# Altium PCB BauhallenUhr_Variante_1.PcbDoc (part 2 of 2)
Units mm, origin at the board's own origin, x right, y up, seen from the top; angles counter-clockwise.
Board outline 100.2 x 100.2 mm, 4 copper layers (Top Layer, Signal Layer 2, GND Layer 3, Bottom Layer), stack 1.54 mm thick; 119 components, 80 nets, 566 pads, 118 vias.
Unrouted connection lines stored in the file: 84.
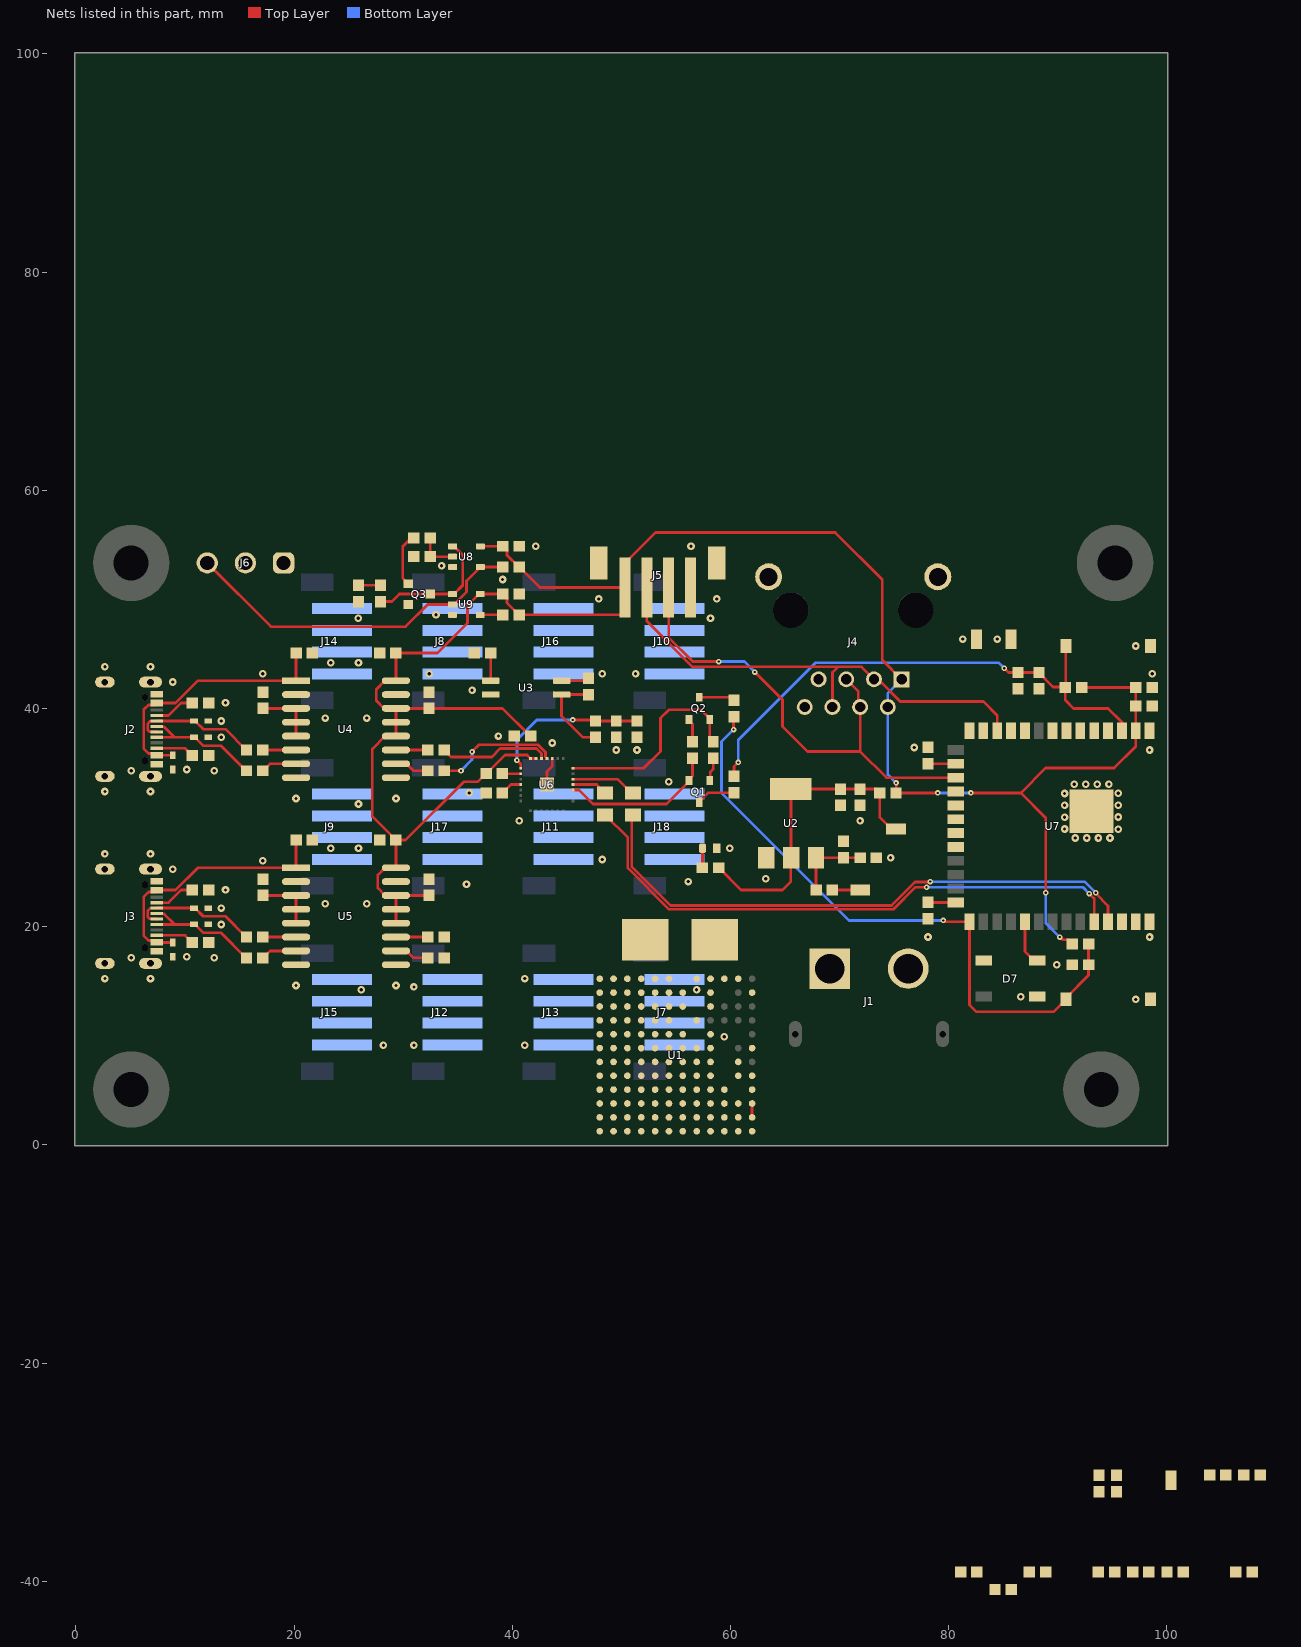
[diagram p2: the nets of this part, all layers, seen from the top]

## Part data
C1 C2 C3 C4 C5 C6 C7 C8 C9 C10 C11 C12 C13 C14 C15 C16 C17 C18 C19 C20 C21 C22 C23 C24 C25 C26 C27 C28 C29: library part Capacitor, "0603"
D1 D2 D3 D4 D5 D6: library part ESD_Protection_Diode, ComponentLink1Description=Supplier, ComponentLink1URL=https://www.digikey.com/en/products/detail/onsemi/ESD5B5-0ST1G/1792206
F1: library part Fuse, "FUSE BRD MNT 10A 125VAC/VDC SMD"
J1: library part PCB_Connector, "Socket, DC supply, male, PIN: 2.", Package=Package, Check_prices=https://www.snapeda.com/parts/XT60PW-M/AMASS/view-part/?ref=eda, MF=AMASS, MP=XT60PW-M, SnapEDA_Link=https://www.snapeda.com/parts/XT60PW-M/AMASS/view-part/?ref=snap
J2 J3: "USB - C - Port"
J4: library part RJ45, "Jack Modular Connector 8p8c (RJ45, Ethernet) 90Â° Angle (Right) Shielded Cat3.", Package=None, Check_prices=https://www.snapeda.com/parts/RJE091884511C/Amphenol/view-part/?ref=eda, MF="Amphenol ICC (Commercial Products)", MP=RJE091884511C, SnapEDA_Link=https://www.snapeda.com/parts/RJE091884511C/Amphenol/view-part/?ref=snap, System=Connector
J5: library part Connector_SMD_Small_Symbol, "CONN HEADER SMD 4POS 2MM.", ComponentLink1Description=Supplier, ComponentLink1URL=https://www.digikey.ch/en/products/detail/jst-sales-america-inc/B4B-PH-SM4-TB/926643
J6: library part Screw_Connector, "691214110003 Wurth Elektronik"
J7 J8 J9 J10 J11 J12 J13 J14 J15 J16 J17 J18: library part Connector_SMD, "CONN HEADER SMD 4POS 2MM.", ComponentLink1Description=Supplier, ComponentLink1URL=https://www.digikey.ch/en/products/detail/jst-sales-america-inc/B4B-PH-SM4-TB/926643
LED1: library part "LED_0603, GREEN", "LED 0603, Green, 3.2 V, 20 mA, 430 mcd"
MEC1 MEC2 MEC3 MEC4: "Mounting Hole for M3 Screw, plated to connect signal"
Q1 Q2: library part NPN_Bipolar_Transistor, "SS8050 SOT - 23.", ComponentLink1Description=Supplier, ComponentLink1URL=https://www.digikey.com/en/products/detail/guangdong-inmark-electronics-co-ltd/SS8050/28539054
Q3: library part PNP_Bipolar_Transistor, "Bipolar (BJT) Transistor PNP 25 V 500 mA 150MHz 300 mW Surface Mount SOT-23."
R1 R2 R3 R4 R5 R6 R7 R8 R9 R10 R11 R12 R13 R14 R15 R16 R17 R18 R20 R22 R23 R24 R25 R26 R27 R28 R29 R30 R31 R32 R33 R34 R35 R36 R37 R38 R39 R40: library part Resistor, "0603"
R19 R21: library part 0805_Resistor, "0805"
S1 S2: library part Button
TP1 TP2 TP3 TP4 TP5: "Prüfstecker und Messbuchsen EZ BoardWare S27 SMT Mini Test Terminal, Reel"
U1: library part DCDC_Converter, "Module DC-DC 1-OUT 0.6V to 5V 15A Automotive 133-Pin BGA Tray.", Package="BGA -133 Analog Devices", Availability="In Stock", Check_prices=https://www.snapeda.com/parts/LTM4627EY%23PBF/Analog+Devices/view-part/?ref=eda, MF="Analog Devices", MP=LTM4627EY#PBF, Price=None, Purchase-URL=https://pricing.snapeda.com/search/part/LTM4627EY#PBF/?ref=eda, SnapEDA_Link=https://www.snapeda.com/parts/LTM4627EY%23PBF/Analog+Devices/view-part/?ref=snap
U2: "LDO, 3.3V and 800mA.", ComponentLink1Description=Datasheet, ComponentLink1URL=chrome-extension://efaidnbmnnnibpcajpcglclefindmkaj/https://www.st.com/content/ccc/resource/technical/document/datasheet/99/3b/7d/91/91/51/4b/be/CD00000544.pdf/files/CD00000544.pdf/jcr:content/translations/en.CD00000544.pdf, ComponentLink2Description=Supplier, ComponentLink2URL=https://www.digikey.ch/en/products/detail/stmicroelectronics/LD1117S33CTR/585765
U3: library part Optocoupler, "Optoisolator Transistor Output 3750Vrms 1 Channel 4-SO."
U4 U5: library part USB_Digital_Isolator, "DGT ISOL 2500VRMS 2CH USB 16SOIC."
U6: "USB to UART bridge.", ComponentLink1Description=Datasheet, ComponentLink1URL=chrome-extension://efaidnbmnnnibpcajpcglclefindmkaj/https://www.silabs.com/documents/public/data-sheets/cp2102n-datasheet.pdf, ComponentLink2Description=Supplierlink, ComponentLink2URL=https://www.digikey.ch/en/products/detail/silicon-laboratories-inc/CP2102N-A02-GQFN28R/9863486?utm_source=findchips&utm_medium=aggregator&utm_campaign=buynow
U7: library part ESP32-S3-WROOM-2-N32R16V, "Bluetooth, WiFi 802.11b/g/n, Bluetooth v5.0 Transceiver Module 2.4GHz PCB Trace Surface Mount", Manufacturer="Espressif Systems", Supplier 1 Part Number=1965-ESP32-S3-WROOM-2-N32R16VCT-ND, Supplier 2 Part Number=356-SP32S3WM2N32R16V, Assembly Technology=SMD, ComponentLink1Description="Show Datasheet on SMS Drive", ComponentLink1URL="P:\Electronic Workshop\Datasheets (Refered in Libraries - Don't Change!)\ESP32-S3-WROOM-2-N32R16V_Digikey_1965-ESP32-S3-WROOM-2-N32R16VCT-ND.pdf", Latest Revision Date=17.10.2025, Latest Revision Made By="Simon Gimple", Latest Revision Note="New Part", Manufacturer Part Number=ESP32-S3-WROOM-2-N32R16V, Supplier 1=DigiKey, Supplier 2=Mouser
U8: library part Single_Bus_Buffer_Gate, "Single Bus Buffer Gate With 3-State Outputs, DBV0005A, LARGE T&R.", ComponentLink1Description=Supplier, ComponentLink1URL=https://www.digikey.com/en/products/detail/texas-instruments/SN74LVC1G126DBVR/385722
U9: library part Single_Bus_Buffer_Gate_Inverted, "Single Bus Buffer Gate With 3-State Outputs, DBV0005A, LARGE T&R.", ComponentLink1Description=Supplier

## Via types
v1: diameter 0.7, hole 0.3, Top Layer to Bottom Layer, 83 vias
v2: diameter 0.508, hole 0.203, Top Layer to Bottom Layer, 19 vias
v3: diameter 0.7, hole 0.3, Top Layer to Bottom Layer, tented top, 16 vias

## Nets (pads, with @x,y where several pads share a name; then routed paths per layer and width w, separated by ;. In a path a pad name is that pad's centre, name@x,y a point inside that pad or via, vN(x,y) a via of type N, cw(c..) or ccw(c..) an arc to the next point about the centre after c; other vN are vias at no path point)
+3.3V: C18.1 C19.1 C20.2 C21.2 C22.2 C23.2 C24.2 C28.2 C29.2 J4.1 J4.2 J5.1 Q3.2 R6.2 R20.2 R27.2 R32.2 R38.2 R39.2 R40.2 U4.12 U4.13 U4.14 U4.16 U5.12 U5.13 U5.14 U5.16 U6.6 U6.7 U7.2 U8.5 U9.5 | length 207.7
  Top Layer w0.25: U5.12@29.343,20.32 U5.13@29.343,21.59 U5.14@29.343,22.86 ; C19.1@32.385,22.86 U5.14@29.343,22.86 ; U8.5@37.082,54.864 C28.2@39.128,54.864 39.153,54.864 39.528,54.489 39.528,54.039 40.603,52.964 R39.2@40.628,52.964 ; R39.2@40.653,52.964 42.527,51.09 J5.1@50.34,51.09 ; C22.2@41.68,37.465 41.655,37.465 39.115,40.005 C18.1@32.385,40.005 U4.14@29.343,40.005 ; U6.6@42.18,35.42 U6.7@41.68,35.42 41.368,35.732 39.341,35.732 37.629,34.02 R20.2@37.604,34.02 37.579,34.02 36.833,33.274 35.56,33.274 30.226,27.94 C21.2@29.343,27.94 ; v2(75.184,33.176) 75.184,32.27 R6.2@75.172,32.258 v2(78.994,32.258) ; J4.1@75.695,42.67 73.914,44.451 73.914,51.816 69.596,56.134 53.134,56.134 50.34,53.34 J5.1@50.34,51.09 ; v2(82.042,32.258) 86.614,32.258 ; v2(88.9,23.114) 88.9,29.972 86.614,32.258 ; v2(90.17,19.05) 90.24,19.05 90.5,18.79 90.95,18.79 R32.2@91.325,18.415 ; R27.2@92.19,41.91 C23.2@97.145,41.91 C24.2@97.145,40.234 U7.2@97.145,37.96 97.145,36.509 95.171,34.535 88.891,34.535 86.614,32.258 ; U5.14@29.343,22.86 28.355,22.86 27.686,23.529 27.686,24.731 28.355,25.4 U5.16@29.343,25.4 C21.2@29.343,27.94 ; C21.2@29.343,27.94 29.318,27.94 28.943,28.315 28.943,28.34 27.178,30.105 27.178,36.288 28.355,37.465 U4.12@29.343,37.465 U4.13@29.343,38.735 U4.14@29.343,40.005 ; U4.14@29.343,40.005 28.254,40.005 27.536,40.724 27.536,41.725 28.355,42.545 U4.16@29.343,42.545 C20.2@29.343,45.085 33.147,45.085 35.897,47.835 35.897,49.425 36.952,50.48 U9.5@37.077,50.48 C29.2@39.128,50.48 39.153,50.48 39.528,50.105 39.528,49.655 40.603,48.58 R40.2@40.628,48.58 49.965,48.58 50.34,48.955 J5.1@50.34,51.09
  Bottom Layer w0.25: v2(75.184,33.176) 74.425,33.935 J4.2@74.425,40.13 74.425,41.4 J4.1@75.695,42.67 ; v2(78.994,32.258) v2(82.042,32.258) ; v2(88.9,23.114) 88.9,20.32 v2(90.17,19.05)
+5V: C1.2 C8.2 C10.2 D7.1 J7.2 J8.2 J9.2 J10.2 J11.2 J12.2 J13.2 J14.2 J15.2 J16.2 J17.2 J18.2 R18.2 TP3.1 U1.J1 U1.J2 U1.J3 U1.J4 U1.J5 U1.J6 U1.J7 U1.J8 U1.J9 U1.J10 U1.J12 U1.K1 U1.K2 U1.K3 U1.K4 U1.K5 U1.K6 U1.K7 U1.K8 U1.K9 U1.K10 U1.K11 U1.L1 U1.L2 U1.L3 U1.L4 U1.L5 U1.L6 U1.L7 U1.L8 U1.L9 U1.L10 U1.L11 U1.M1 U1.M2 U1.M3 U1.M4 U1.M5 U1.M6 U1.M7 U1.M8 U1.M9 U1.M10 U1.M11 U3.4 | length 2.6
  Top Layer w0.25: U3.4@44.525,42.545 46.76,42.545 R18.2@46.99,42.775
+12V: C9.2 C11.2 C12.2 F1.2 J6.2 R2.1 R3.2 TP1.1 U1.A1 U1.A2 U1.A3 U1.A4 U1.A5 U1.A6 U1.B1 U1.B2 U1.B3 U1.B4 U1.B5 U1.B6 U1.C1 U1.C2 U1.C3 U1.C4 U1.C5 U1.C6 | length 2.5
  Top Layer w0.25: R2.1@69.343,23.368 TP1.1@71.882,23.368
D1: J7.3 U7.39
D2: J13.3 U7.38
D3: J10.3 U7.4
D4: J16.3 U7.5
D5: J8.3 U7.6
D6: J14.3 U7.7
D7: J11.3 U7.18
D8: J17.3 U7.19
D9: J9.3 U7.20
D10: J15.3 U7.21
D11: J12.3 U7.22
D12: J18.3 U7.8
DATA: J6.3 R39.1 U8.4 U9.2 | length 32.4
  Top Layer w0.25: J6.3@12.05,53.34 17.892,47.498 30.226,47.498 32.258,49.53 U9.2@34.527,49.53 34.652,49.53 35.814,50.692 35.814,51.696 36.807,52.689 36.807,52.814 36.957,52.964 U8.4@37.082,52.964 R39.1@39.128,52.964
DTR: Q2.2 R28.2 U6.28 | length 19.1
  Top Layer w0.25: U6.28@45.58,34.52 52.046,34.52 53.594,36.068 53.594,39.116 54.356,39.878 57.317,39.878 58.1,39.095 Q2.2@58.1,38.995 58.1,37.265 R28.2@58.42,36.945
EN: C25.2 C26.2 R27.1 R30.2 S1.2 U7.3 | length 49.1
  Top Layer w0.25: R30.2@60.325,33.77 60.325,34.67 v2(60.706,35.052) ; v2(85.09,43.688) 85.092,43.688 85.485,43.295 C26.2@86.36,43.295 C25.2@88.265,43.295 88.265,43.27 89.575,41.96 90.74,41.96 S1.2@90.74,45.72 ; R27.1@90.69,41.91 90.69,40.755 91.44,40.005 94.615,40.005 95.885,38.735 95.885,37.97 U7.3@95.875,37.96
  Bottom Layer w0.25: v2(60.706,35.052) 60.706,37.084 67.818,44.196 84.582,44.196 v2(85.09,43.688)
GND: C2.1 C3.1 C4.1 C5.1 C6.1 C7.1 C8.1 C9.1 C10.1 C11.1 C12.1 C15.2 C18.2 C19.2 C20.1 C21.1 C22.1 C23.1 C24.1 C25.1 C26.1 C27.1 C28.1 C29.1 D7.3 J1.2 J4.7 J4.8 J4.SH1 J4.SH2 J5.4 J5.SH1 J5.SH2 J6.1 J7.1 J7.4 J8.1 J8.4 J9.1 J9.4 J10.1 J10.4 J11.1 J11.4 J12.1 J12.4 J13.1 J13.4 J14.1 J14.4 J15.1 J15.4 J16.1 J16.4 J17.1 J17.4 J18.1 J18.4 LED1.K R1.1 R4.1 R13.1 R26.1 R33.2 R34.2 R37.1 S1.1 S2.1 TP4.1 TP5.1 U1.A8 U1.B7 U1.B9 U1.C7 U1.C9 U1.D1 U1.D2 U1.D3 U1.D4 U1.D5 U1.D6 U1.D8 U1.E1 U1.E2 U1.E3 U1.E4 U1.E5 U1.E6 U1.E7 U1.E9 U1.F1 U1.F2 U1.F3 U1.F4 U1.F5 U1.F6 U1.F7 U1.F8 U1.F9 U1.G1 U1.G2 U1.G3 U1.G4 U1.G5 U1.G6 U1.G7 U1.G8 U1.G9 U1.G11 U1.H1 U1.H2 U1.H3 U1.H4 U1.H5 U1.H6 U1.H7 U1.H8 U1.H9 U1.H11 U1.H12 U1.M12 U2.1 U4.9 U4.15 U5.9 U5.15 U6.3 U6.29 U7.1 U7.40 U7.41 U8.3 U9.3 | length 2.6
  Top Layer w0.25: U6.29@43.18,33.02 43.18,34.225 43.68,34.725 U6.3@43.68,35.42
  other v1: 28.194,9.144 30.988,9.144 41.148,9.144 59.436,9.906 97.155,13.335 86.614,13.59 26.162,14.224 56.896,14.224 30.988,14.478 29.343,14.605 41.148,15.24 89.916,16.51 78.105,19.05 98.415,19.05 26.67,22.098 35.814,23.876 56.134,24.13 63.246,24.384 48.26,26.162 74.676,26.314 25.908,27.178 59.944,27.178 40.64,29.718 71.882,29.718 25.908,31.242 29.343,31.75 36.068,32.258 54.356,33.274 49.53,36.195 51.435,36.195 98.415,36.195 76.835,36.425 43.68,36.83 38.735,37.465 26.67,39.116 36.322,41.656 32.385,43.18 48.26,43.18 51.308,43.18 98.645,43.18 25.908,44.196 97.155,45.72 81.28,46.355 84.455,46.355 25.896,48.26 58.166,48.26 33.02,48.58 47.94,50.038 58.74,50.038 39.116,51.816 33.528,53.086 42.164,54.864 56.388,54.864
  other v3: 91.601,28.133 92.663,28.133 93.725,28.133 94.787,28.133 90.625,28.949 95.55,28.933 90.625,30.033 95.55,30.049 90.625,31.117 95.55,31.133 90.625,32.201 95.55,32.217 91.5,33.058 92.562,33.058 93.624,33.058 94.686,33.058
GND_A: C13.1 C16.2 D1.A D3.A D5.A J2.A1_B12 J2.B1_A12 J2.SH1 J2.SH2 J2.SH3 J2.SH4 R7.2 R8.2 U3.2 U4.2 U4.8
  other v1: 20.187,31.75 2.67,32.385 6.85,32.385 5.08,34.29 12.7,34.29 10.16,34.4 13.335,37.35 13.335,38.85 22.86,39.116 13.716,40.513 8.89,42.42 17.145,43.18 2.67,43.815 6.85,43.815 23.368,44.196
GND_B: C14.1 C17.2 D2.A D4.A D6.A J3.A1_B12 J3.B1_A12 J3.SH1 J3.SH2 J3.SH3 J3.SH4 R9.2 R10.2 U5.2 U5.8
  other v1: 20.187,14.605 2.67,15.24 6.85,15.24 5.08,17.145 12.7,17.145 10.16,17.255 13.335,20.205 13.335,21.705 22.86,22.098 13.716,23.368 8.89,25.275 17.145,26.035 2.67,26.67 6.85,26.67 23.368,27.178
GPIO0: C27.2 R31.2 R32.1 S2.2 U7.27 | length 58.3
  Top Layer w0.25: v2(60.289,38.066) 60.289,39.219 R31.2@60.325,39.255 ; v2(79.502,20.574) 79.572,20.574 79.686,20.46 U7.27@81.905,20.46 81.905,12.837 82.55,12.192 89.597,12.192 90.24,12.835 90.365,12.835 90.74,13.21 S2.2@90.74,13.335 90.74,13.46 92.825,15.545 C27.2@92.825,16.51 R32.1@92.825,18.415
  Bottom Layer w0.25: v2(60.289,38.066) 59.182,36.959 59.182,32.258 70.866,20.574 v2(79.502,20.574)
GPIO19: D4.K J3.A7 J3.B7 R16.1 | length 11.7
  Top Layer w0.25: J3.A7@7.425,20.705 7.4,20.73 6.75,20.73 6.604,20.876 6.604,21.463 6.821,21.68 7.4,21.68 J3.B7@7.425,21.705 D4.K@10.83,21.705 10.93,21.705 11.68,20.955 13.715,20.955 15.62,19.05 R16.1@15.645,19.05
GPIO19_2: R24.2 U7.13
GPIO20: D6.K J3.A6 J3.B6 R17.1 | length 11.5
  Top Layer w0.25: J3.B6@7.425,20.205 9.069,20.205 ; J3.A6@7.425,21.205 7.45,21.18 J3.A6@7.998,21.18 ; J3.A6@7.999,21.179 8.095,21.179 9.069,20.205 ; R17.1@15.645,17.145 15.62,17.145 13.334,19.431 11.704,19.431 10.93,20.205 D6.K@10.83,20.205 9.069,20.205
GPIO20_2: R25.2 U7.14
NetC1_1: C1.1 R1.2 U1.F12
NetC2_2: C2.2 C3.2 R2.2 U2.3 | length 7
  Top Layer w0.25: R2.2@67.843,23.368 U2.3@67.843,26.314 C2.2@70.358,26.314 C3.2@71.882,26.314
NetC4_2: C4.2 C6.2 R5.2 R6.1 TP2.1 U2.2 U2.4 | length 28.7
  Top Layer w0.25: R5.2@58.916,25.4 58.941,25.4 60.973,23.368 64.77,23.368 65.532,24.13 65.532,26.289 U2.2@65.557,26.314 65.557,32.588 U2.4@65.532,32.614 C4.2@70.104,32.614 C6.2@71.882,32.614 73.316,32.614 R6.1@73.672,32.258 73.672,30.056 74.772,28.956 TP2.1@75.172,28.956
NetC5_2: C5.2 U1.A9
NetC7_2: C7.2 U1.A11
NetC15_1: C15.1 R12.1 R13.2 U6.8 | length 14.5
  Top Layer w0.25: v2(40.432,35.253) 40.78,34.905 U6.8@40.78,34.52 ; v2(45.551,38.947) 47.528,38.947 R12.1@47.625,38.85 R13.2@49.53,38.85 C15.1@51.435,38.85
  Bottom Layer w0.25: v2(40.432,35.253) 40.432,37.13 42.249,38.947 v2(45.551,38.947)
NetC16_1: C16.1 U4.3 U4.4 U4.5 | length 5.6
  Top Layer w0.25: C16.1@17.145,40.005 U4.3@20.187,40.005 U4.5@20.187,37.465
NetC17_1: C17.1 U5.3 U5.4 U5.5 | length 5.6
  Top Layer w0.25: C17.1@17.145,22.86 U5.3@20.187,22.86 U5.5@20.187,20.32
NetD7_4: D7.4 U7.31 | length 4.2
  Top Layer w0.25: U7.31@86.985,20.46 86.985,17.733 87.828,16.89 D7.4@88.128,16.89
NetF1_1: F1.1 J1.1
NetJ2_A5: J2.A5 R8.1 | length 3.7
  Top Layer w0.25: J2.A5@7.425,39.35 8.49,39.35 9.64,40.5 R8.1@10.68,40.5
NetJ2_B5: J2.B5 R7.1 | length 3.5
  Top Layer w0.25: J2.B5@7.425,36.35 10.005,36.35 10.655,35.7 R7.1@10.68,35.7
NetJ3_A5: J3.A5 R10.1 | length 3.7
  Top Layer w0.25: J3.A5@7.425,22.205 8.49,22.205 9.64,23.355 R10.1@10.68,23.355
NetJ3_B5: J3.B5 R9.1 | length 3.5
  Top Layer w0.25: J3.B5@7.425,19.205 10.005,19.205 10.655,18.555 R9.1@10.68,18.555
NetLED1_A: LED1.A R5.1 | length 1.8
  Top Layer w0.25: R5.1@57.416,25.4 57.442,25.426 LED1.A@57.442,27.185
NetQ1_1: Q1.1 R28.1 | length 2.2
  Top Layer w0.25: Q1.1@58.1,33.395 58.16,33.455 58.16,34.17 58.42,34.43 R28.1@58.42,35.445
NetQ1_3: Q1.3 R30.1 | length 3.6
  Top Layer w0.25: Q1.3@57.15,31.375 57.15,31.475 57.945,32.27 R30.1@60.325,32.27
NetQ2_1: Q2.1 R29.1 | length 2.2
  Top Layer w0.25: Q2.1@56.2,38.995 56.2,38.895 56.515,38.58 R29.1@56.515,36.945
NetQ2_3: Q2.3 R31.1 | length 3.3
  Top Layer w0.25: Q2.3@57.15,41.015 60.065,41.015 R31.1@60.325,40.755
NetQ3_1: Q3.1 R35.1 | length 5
  Top Layer w0.25: Q3.1@30.468,51.43 30.418,51.43 30.143,51.705 30.143,51.755 29.972,51.926 29.972,54.864 30.734,55.626 R35.1@30.988,55.626
NetR3_1: R3.1 U1.A10
NetR4_2: R4.2 U1.B12
NetR11_1: R11.1 U3.1 | length 2.5
  Top Layer w0.25: U3.1@38.025,42.545 R11.1@38.025,45.085
NetR12_2: R12.2 R18.1 U3.3 | length 8.4
  Top Layer w0.25: R18.1@46.99,41.275 U3.3@44.525,41.275 44.525,39.295 46.47,37.35 R12.2@47.625,37.35
NetR14_2: R14.2 U4.6 | length 3
  Top Layer w0.25: R14.2@17.145,36.195 U4.6@20.187,36.195
NetR15_2: R15.2 U4.7 | length 3.3
  Top Layer w0.25: R15.2@17.145,34.29 17.17,34.29 17.805,34.925 U4.7@20.187,34.925
NetR16_2: R16.2 U5.6 | length 3
  Top Layer w0.25: R16.2@17.145,19.05 U5.6@20.187,19.05
NetR17_2: R17.2 U5.7 | length 3.3
  Top Layer w0.25: R17.2@17.145,17.145 17.17,17.145 17.805,17.78 U5.7@20.187,17.78
NetR19_2: R19.2 U6.25 | length 3.3
  Top Layer w0.25: U6.25@45.58,33.02 47.738,33.02 47.908,32.85 47.908,32.723 48.387,32.244 R19.2@48.514,32.244
NetR20_1: R20.1 U6.9 | length 1.7
  Top Layer w0.25: R20.1@39.104,34.02 U6.9@40.78,34.02
NetR21_2: R21.2 U6.26 | length 6
  Top Layer w0.25: U6.26@45.58,33.52 49.651,33.52 50.927,32.244 R21.2@51.054,32.244
NetR22_1: R22.1 U4.11 | length 2.9
  Top Layer w0.25: U4.11@29.343,36.195 R22.1@32.27,36.195
NetR23_1: R23.1 U4.10 | length 3.2
  Top Layer w0.25: U4.10@29.343,34.925 30.331,34.925 30.966,34.29 R23.1@32.27,34.29
NetR24_1: R24.1 U5.11 | length 2.9
  Top Layer w0.25: U5.11@29.343,19.05 R24.1@32.27,19.05
NetR25_1: R25.1 U5.10 | length 3.2
  Top Layer w0.25: U5.10@29.343,17.78 30.331,17.78 30.966,17.145 R25.1@32.27,17.145
NetR26_2: R26.2 U6.11 | length 2
  Top Layer w0.25: R26.2@39.104,32.258 39.129,32.258 39.891,33.02 U6.11@40.78,33.02
NetR33_1: R33.1 U7.26 | length 2.6
  Top Layer w0.25: R33.1@78.105,22.225 U7.26@80.655,22.225
NetR34_1: R34.1 U7.16 | length 2.6
  Top Layer w0.25: R34.1@78.105,34.925 U7.16@80.655,34.925
NetR36_1: R36.1 R37.2 | length 2
  Top Layer w0.25: R37.2@25.896,51.296 R36.1@27.928,51.296
RTS: Q1.2 R29.2 U6.24 | length 14.2
  Top Layer w0.25: U6.24@45.58,32.52 46.115,32.52 47.393,31.242 54.147,31.242 56.2,33.295 Q1.2@56.2,33.395 ; Q1.2@56.2,33.495 56.515,33.81 R29.2@56.515,35.445
SCL: J4.4 J4.5 J5.3 U7.17 | length 44.8
  Top Layer w0.25: J5.3@54.34,51.09 54.34,46.498 56.544,44.294 v2(58.928,44.294) ; v2(62.23,43.336) 64.77,40.796 64.77,38.354 67.059,36.065 71.885,36.065 ; J4.5@70.615,42.67 71.724,41.561 71.724,40.291 J4.4@71.885,40.13 71.885,36.065 ; U7.17@80.655,33.655 74.295,33.655 71.885,36.065
  Bottom Layer w0.25: v2(58.928,44.294) 61.272,44.294 v2(62.23,43.336)
SDA: J4.3 J4.6 J5.2 U7.12 | length 44.1
  Top Layer w0.25: J5.2@52.34,51.09 52.34,47.99 56.515,43.815 69.85,43.815 ; J4.6@69.345,40.13 69.345,43.31 69.85,43.815 ; U7.12@84.445,37.96 84.445,39.38 83.185,40.64 75.565,40.64 73.876,42.329 73.823,42.329 73.482,42.67 J4.3@73.155,42.67 72.01,43.815 69.85,43.815
TX_EN: Q3.3 R36.2 U8.1 U9.1 | length 12.2
  Top Layer w0.25: R36.2@27.928,49.796 28.968,49.796 29.652,50.48 Q3.3@32.468,50.48 U9.1@34.527,50.48 34.652,50.48 35.464,51.292 35.464,54.057 34.657,54.864 U8.1@34.532,54.864
U0_RXD: R19.1 U7.36 | length 53.4
  Top Layer w0.25: R19.1@48.514,30.24 50.593,28.161 50.593,25.366 54.369,21.59 74.917,21.59 76.949,23.622 v2(77.978,23.622) ; v2(92.879,23.029) 93.335,22.574 U7.36@93.335,20.46
  Bottom Layer w0.25: v2(77.978,23.622) 92.287,23.622 v2(92.879,23.029)
U0_TXD: R21.1 U7.37 | length 53.2
  Top Layer w0.25: R21.1@51.054,30.24 50.943,30.129 50.943,25.511 54.514,21.94 74.772,21.94 76.933,24.101 78.289,24.101 v2(78.316,24.128) ; v2(93.483,23.103) 93.483,23.033 94.605,21.911 U7.37@94.605,20.46
  Bottom Layer w0.25: v2(78.316,24.128) 92.458,24.128 v2(93.483,23.103)
U1_RXD: R40.1 U7.11 U9.4 | length 2.1
  Top Layer w0.25: U9.4@37.077,48.58 R40.1@39.128,48.58
U1_TXD: R35.2 R38.1 U7.10 U8.2 | length 3.8
  Top Layer w0.25: R35.2@32.488,55.626 R38.1@32.488,53.914 U8.2@34.532,53.914
USB_DN: D3.K J2.A7 J2.B7 R14.1 | length 11.7
  Top Layer w0.25: J2.A7@7.425,37.85 7.4,37.875 6.75,37.875 6.604,38.021 6.604,38.608 6.821,38.825 7.4,38.825 J2.B7@7.425,38.85 D3.K@10.83,38.85 10.93,38.85 11.68,38.1 13.715,38.1 15.62,36.195 R14.1@15.645,36.195
USB_DN_2: R22.2 U6.5 | length 10.1
  Top Layer w0.25: R22.2@33.77,36.195 33.795,36.195 34.17,35.82 34.17,35.795 34.405,35.56 38.134,35.56 38.896,36.322 42.221,36.322 42.68,35.863 U6.5@42.68,35.42
USB_DP: D5.K J2.A6 J2.B6 R15.1 | length 11.5
  Top Layer w0.25: J2.B6@7.425,37.35 9.069,37.35 ; J2.A6@7.425,38.35 7.45,38.325 J2.A6@7.998,38.325 ; J2.A6@7.999,38.324 8.095,38.324 9.069,37.35 ; R15.1@15.645,34.29 15.62,34.29 13.334,36.576 11.704,36.576 10.93,37.35 D5.K@10.83,37.35 9.069,37.35
USB_DP_2: R23.2 U6.4 | length 11.6
  Top Layer w0.25: R23.2@33.77,34.29 v2(35.306,34.29) ; v2(36.322,36.039) 36.955,36.672 42.371,36.672 43.055,35.988 43.055,35.545 U6.4@43.18,35.42
  Bottom Layer w0.25: v2(35.306,34.29) 36.322,35.306 v2(36.322,36.039)
VBUS_A: C13.2 D1.K J2.A4_B9 J2.B4_A9 R11.2 U4.1 | length 24.1
  Top Layer w0.25: D1.K@8.89,35.7 J2.B4_A9@7.425,35.7 7.25,35.875 6.67,35.875 6.223,36.322 6.223,39.878 6.67,40.325 7.25,40.325 J2.A4_B9@7.425,40.5 9.145,40.5 11.19,42.545 U4.1@20.187,42.545 C13.2@20.187,45.085
VBUS_B: C14.2 D2.K J3.A4_B9 J3.B4_A9 U5.1 | length 24.1
  Top Layer w0.25: D2.K@8.89,18.555 J3.B4_A9@7.425,18.555 7.25,18.73 6.67,18.73 6.223,19.177 6.223,22.733 6.67,23.18 7.25,23.18 J3.A4_B9@7.425,23.355 9.145,23.355 11.19,25.4 U5.1@20.187,25.4 C14.2@20.187,27.94
VOUT_LCL: U1.K12 U1.L12 | length 1.3
  Top Layer w0.25: U1.L12@61.985,2.524 U1.K12@61.985,3.794
pads on no net: D7.2 J1.SH1 J1.SH2 J2. J2.A8 J2.B8 J3. J3.A8 J3.B8 J4. J7.SH1 J7.SH2 J8.SH1 J8.SH2 J9.SH1 J9.SH2 J10.SH1 J10.SH2 J11.SH1 J11.SH2 J12.SH1 J12.SH2 J13.SH1 J13.SH2 J14.SH1 J14.SH2 J15.SH1 J15.SH2 J16.SH1 J16.SH2 J17.SH1 J17.SH2 J18.SH1 J18.SH2 MEC1.1 MEC2.1 MEC3.1 MEC4.1 U1.A7 U1.A12 U1.B11 U1.C10 U1.C11 U1.C12 U1.D9 U1.D10 U1.D11 U1.D12 U1.E12 U1.F11 U1.G12 U6.1 U6.2 U6.10 U6.12 U6.13 U6.14 U6.15 U6.16 U6.17 U6.18 U6.19 U6.20 U6.21 U6.22 U6.23 U6.27 U7.9 U7.15 U7.23 U7.24 U7.25 U7.28 U7.29 U7.30 U7.32 U7.33 U7.34 U7.35

## Polygon pours and split planes (outlines as drawn)
+12V on Top Layer "+12V_L01_P013" (solid, pour order 13): 47.498,12.192 47.498,15.748 49.53,15.748 49.53,23.114 54.864,23.114 54.864,12.192
GND on Top Layer "GND_L01_P016" (solid, pour order 16): 0.159,46.355 0,46.514 0,58.42 100.33,58.42 100.33,0 0,0 0.159,0.159 0.159,12.065 24.765,12.065 24.765,46.355
+5V on Top Layer "+5V_L01_P010" (solid, pour order 10): 47.498,5.588 62.484,5.588 62.484,4.572 61.214,4.572 61.214,0.762 47.498,0.762
GND_A on Top Layer "GND_A_L01_P015" (solid, pour order 15): 24.765,46.355 0,46.355 0,29.21 24.765,29.21
GND_B on Top Layer "GND_B_L01_P014" (solid, pour order 14): 24.765,29.21 0,29.21 0,12.065 24.765,12.065
+12V on Top Layer "+12V_L01_P009" (solid, pour order 9): 261.366,198.628 268.732,198.628 268.732,195.072 261.366,195.072

## Keep-outs
Keep-Out Layer:
  lines w0.013: 0,0 100,0 100,100 0,100 0,0

## Other copper
Top Layer:
  text "TOP (Normal Size)" at 21,-12 h1
  text "TOP (Small Size)" at 28,-18 h0.7
  text "SMS-2025.9" at 10.9,-21.5 h1
  text "SMS-2017.11 (0.7 MM IST MIN. TEXTHOEHE)" at 28,-21.5 h0.7
  text "TOP" at 10.9,-25 h1
Bottom Layer:
  text "BOT (Normal Size)" at 37,-14 h1
  text "BOT (Small Size)" at 38,-19 h0.7
  text "BOT" at 12.637,-24.819 h1

## Silkscreen, mask and mechanical layers (free items; w line width, h text height)
Top Overlay:
  text "GND" at 81.28,49.56 h2.54
  text "USB to UART" at 1.399,29.89 h2.54
  text "ESP USB" at 1.27,12.73 h2.54
Top Solder:
  text "SMS-2025.9" at 10.9,-21.5 h1
  text "SMS LAB - SOMNOMAT V5" at 27.7,-23.8 h1

## Text inside footprints (layer, text, board x,y; h text height)
J2: Mechanical 13 "PCB EDGE" at 0.17,32.7 h0.41 r270
J3: Mechanical 13 "PCB EDGE" at 0.17,15.555 h0.41 r270
J4: Mechanical 13 "PCB Edge" at 59.185,54.1 h0.81